# EAGLE board general (EAGLE 7.4.0)
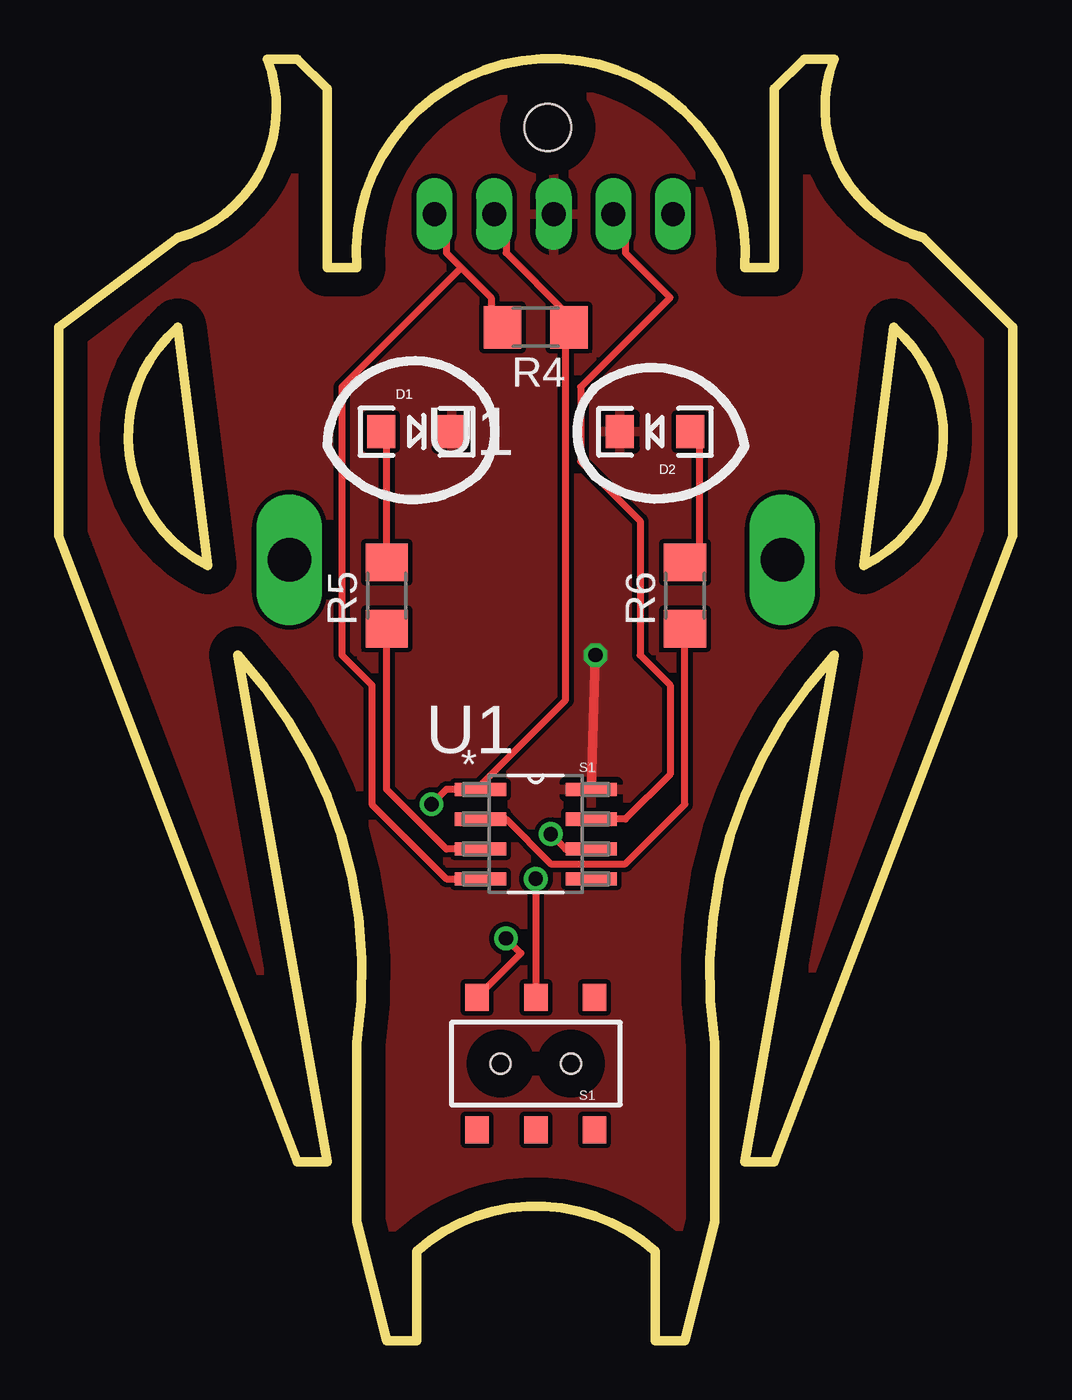
[diagram p0: board, top side]
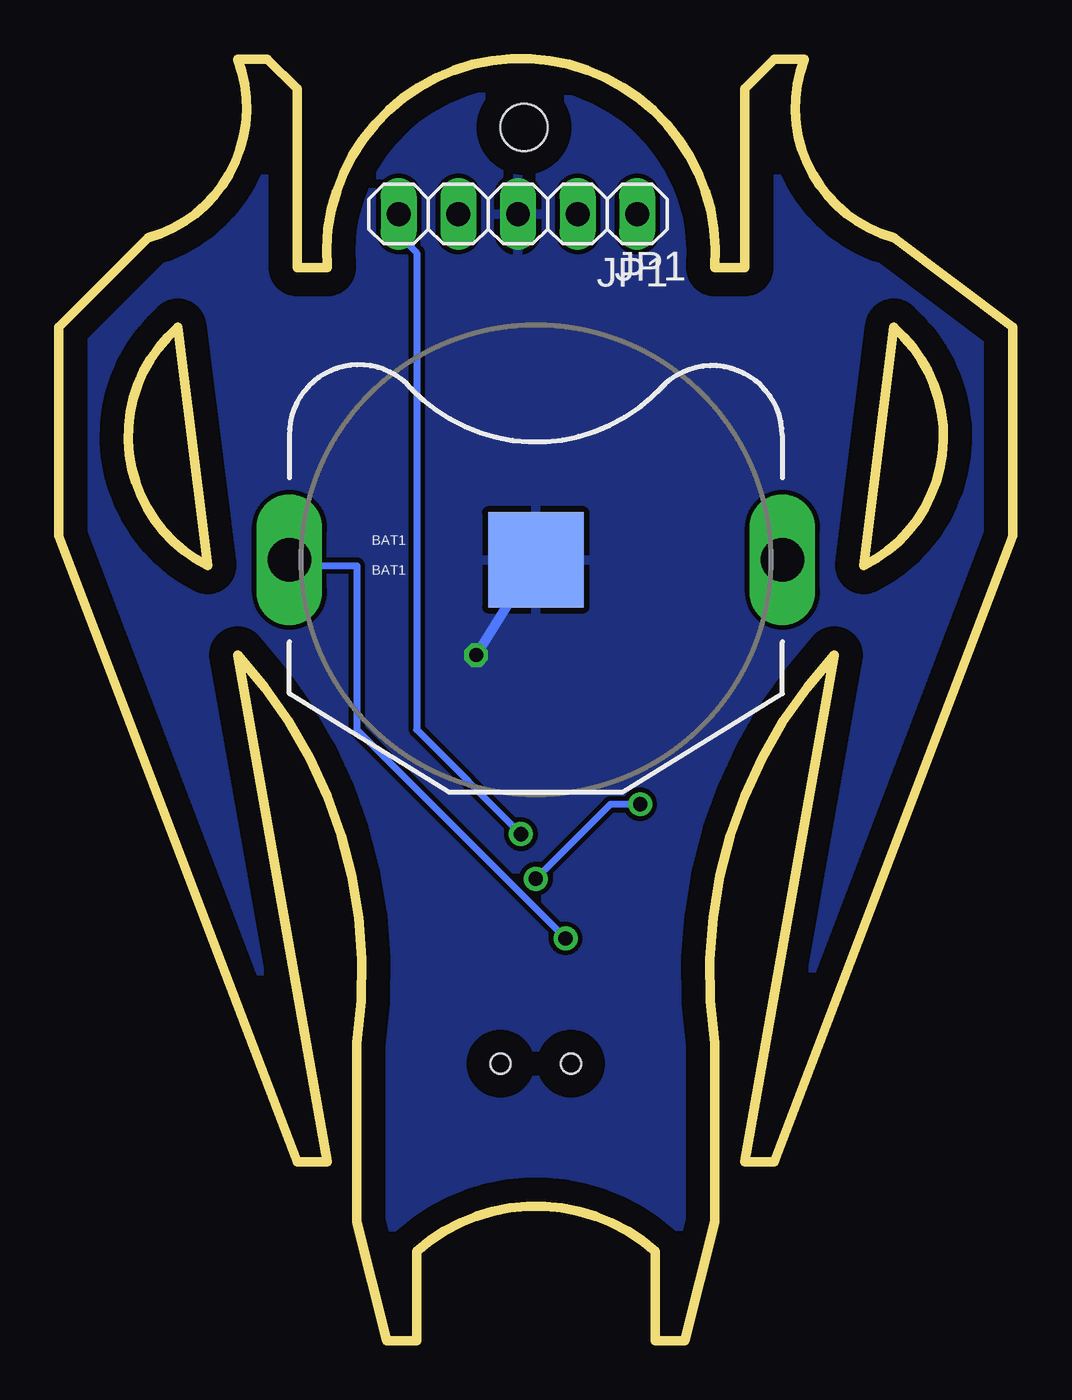
[diagram p1: board, bottom side, seen from below]

Size 40.64 x 54.62 mm. Coordinates in mm from the lower left corner, seen from the top.
Outline: 36.83,46.99 arc-95 33.02,54.61 31.75,54.61 30.48,53.34 30.48,45.72 29.21,45.72 arc189 12.7,45.72 11.43,45.72 11.43,53.34 10.16,54.61 8.89,54.61 arc-95 5.08,46.99 0,43.18 0,34.29 10.16,7.62 11.43,7.62 7.62,29.21 arc-51 12.7,12.7 12.7,5.08 13.97,0 15.24,0 15.24,3.81 arc-83 25.4,3.81 25.4,0 26.67,0 27.94,5.08 27.94,12.7 arc-51 33.02,29.21 29.21,7.62 30.48,7.62 40.64,34.29 40.64,43.18 36.83,46.99
Outline: 34.29,33.02 35.56,43.18 arc-112 34.29,33.02
Outline: 6.35,33.02 5.08,43.18 arc112 6.35,33.02
Copper layers (1*16): Top 0.035mm / dielectric 1.5mm / Bottom 0.035mm
Design rules "default *": minimum track width 12mil, minimum drill 24mil, track to track 8mil, track to pad 8mil, pad to pad 8mil, via to via 8mil, smd to smd 8mil, copper to edge 40mil, drill to drill 8mil, minimum pad ring 10mil, minimum via ring 8mil, stop-mask expansion 4mil, vias tented up to drill 0mil, thermal gap 10mil
Holes 2 mm at 20.83,51.69

## Footprints (pad centres in the part's own frame; a part is rotated, then mirrored left to right if it is on the bottom)
BATTERY_20MM_PTH_COMPACT = drill 1.854 long: 1 -10.5,0; 3 10.5,0 | smd 4.064 x 4.064: 2 0,0
LED-1206 = smd 1.2 x 1.4: A -1.5,0; C 1.5,0
1X05 = drill 1.016 long: 1 -5.08,0; 2 -2.54,0; 3 0,0; 4 2.54,0; 5 5.08,0
R1206 = smd 1.6 x 1.803: 1 -1.422,0; 2 1.422,0
AYZ0202 = smd 1 x 1.15: 1 -2.5,2.825; 2 0,2.825; 3 2.5,2.825; 4 -2.5,-2.825; 5 0,-2.825; 6 2.5,-2.825 | hole 0.85: 1.5,0; -1.5,0
SOIC127P600X175-8N = smd 2.184 x 0.559: 1 -2.362,1.905; 2 -2.362,0.635; 3 -2.362,-0.635; 4 -2.362,-1.905; 5 2.362,-1.905; 6 2.362,-0.635; 7 2.362,0.635; 8 2.362,1.905

## Placement (x,y rotation side)
BAT1  [BATTERY_20MM_PTH_COMPACT]  20.32,33.27 0 bottom
D1  [LED-1206]  15.24,38.73 0 top
D2  [LED-1206]  25.4,38.73 180 top
JP1  [1X05]  21.08,48.01 180 bottom
R4  [R1206]  20.32,43.18 180 top
R5  [R1206]  13.97,31.75 90 top
R6  [R1206]  26.67,31.75 90 top
S1  AYZ0202  [AYZ0202]  20.32,11.81 180 top
U1  PIC12F1822-I/SN  [SOIC127P600X175-8N]  20.32,21.59 0 top

## Library data of the parts
BAT1 = SparkFun-Electromechanical
D1 D2 = SparkFun-LED
JP1 = pinhead
R4-R6 = resistor
S1 = SparkFun-Electromechanical; PROD_ID: SWCH-08179
U1 = PIC12F1822ISN; MPN: PIC12F1822-I/SN; OC_FARNELL: 1971857; OC_NEWARK: 53R0197; PACKAGE: SOIC-8; SUPPLIER: Microchip

## Nets
GND: BAT1.2 D1.C D2.C JP1.3 U1.8
ICSPCLK: JP1.5 U1.6
ICSPDAT: JP1.4 U1.7
N$1: BAT1.1 S1.6
N$4: R6.1 U1.2
N$5: R5.1 U1.3
N$6: D2.A R6.2
N$7: D1.A R5.2
VDD: JP1.2 R4.1 S1.5 U1.1
VPP: JP1.1 R4.2 U1.4

## Tracks (layer width: path | path; a pad name or v marks a point on that pad's centre or on a via)
GND  (via drill 0.6)
  Top 0.406: U1.8 v22.86,29.21
  Bottom 0.406: v22.86,29.21 BAT1.2
  pour Top: 0,0 40.64,0 40.64,54.61 0,54.61
  pour Bottom: 40.64,0 0,0 0,54.61 40.64,54.61
ICSPCLK  (via drill 0.61)
  Top 0.305: U1.6 21.59,20.95 v20.95,21.59
  Bottom 0.305: v20.95,21.59 25.4,26.04 25.4,46.35 26.67,47.62 JP1.5
ICSPDAT
  Top 0.305: U1.7 24.13,22.23 26.04,24.13 26.04,27.94 24.77,29.21 24.77,34.92 22.23,37.47 22.23,40.64 26.04,44.45 24.13,46.35 24.13,47.62 JP1.4
N$1  (via drill 0.61)
  Top 0.305: v19.05,17.14 19.68,16.51 17.78,14.61 S1.6
  Bottom 0.305: v19.05,17.14 27.94,26.04 27.94,33.02 30.48,33.02 BAT1.1
N$4
  Top 0.305: R6.1 26.67,22.86 24.13,20.32 20.95,20.32 19.05,22.23 U1.2
N$5
  Top 0.305: R5.1 13.97,23.5 16.51,20.95 U1.3
N$6
  Top 0.305: D2.A 27.3,38.73 27.3,33.66 26.67,33.02 R6.2
N$7
  Top 0.305: R5.2 13.97,38.73 D1.A
VDD  (via drill 0.61)
  Top 0.305: 21.59,43.18 21.59,43.81 19.05,46.35 19.05,47.62 JP1.2 | v20.32,19.68 S1.5 20.32,14.61 | v15.88,22.86 16.51,23.5 17.78,23.5 | 21.59,43.18 21.59,27.3 17.78,23.5 | 21.59,43.18 R4.1 | 17.78,23.5 U1.1
  Bottom 0.305: v20.32,19.68 17.14,22.86 v15.88,22.86
VPP
  Top 0.305: 17.14,45.72 16.51,46.35 16.51,47.62 JP1.1 | 17.14,45.72 18.41,44.45 18.41,43.18 R4.2 | U1.4 16.51,19.68 13.34,22.86 13.34,27.94 12.06,29.21 12.06,40.64 17.14,45.72

## Text on the board
_tNames: R4 | D1 | U1 | D2 | R5 | R6 | S1
_bNames: JP1 | BAT1